# Altium PCB PCB1test.PcbDoc
Units mil, origin at the board's own origin, x right, y up, seen from the top; angles counter-clockwise.
Board outline 6000 x 4000 mil, 2 copper layers (Top Layer, Bottom Layer); 292 components, 184 nets, 916 pads, 0 vias.
Unrouted connection lines stored in the file: 615.
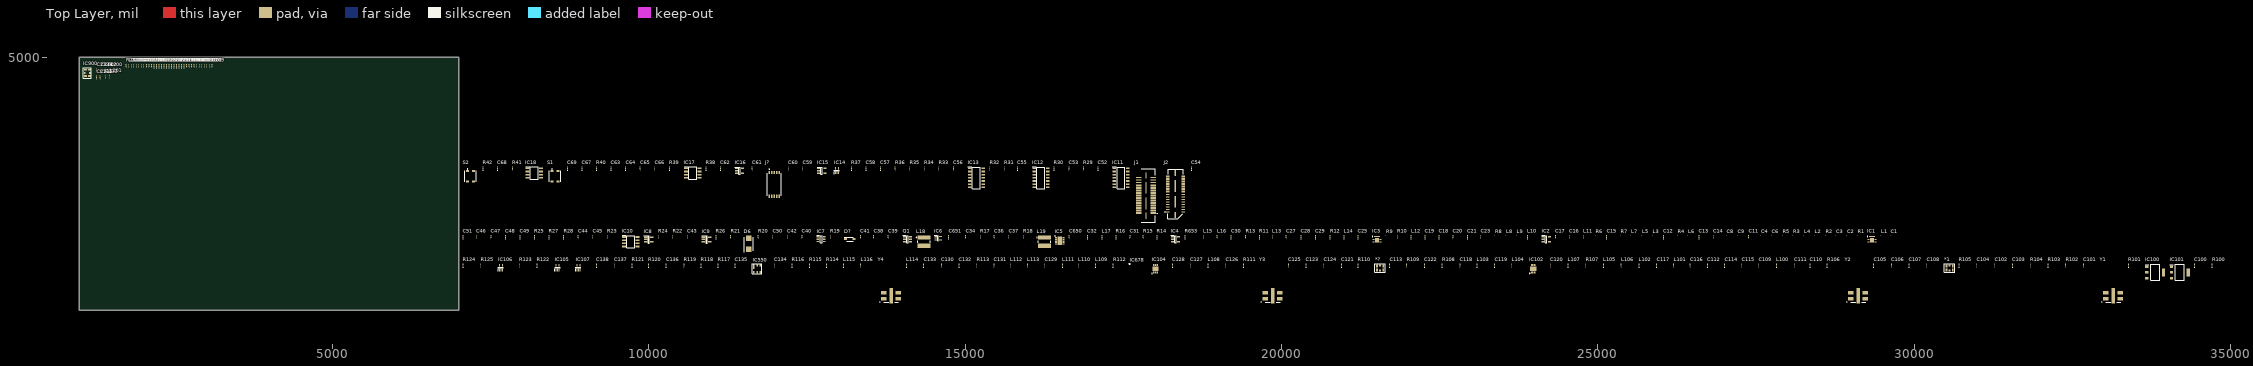
[diagram p0: Top Layer view]
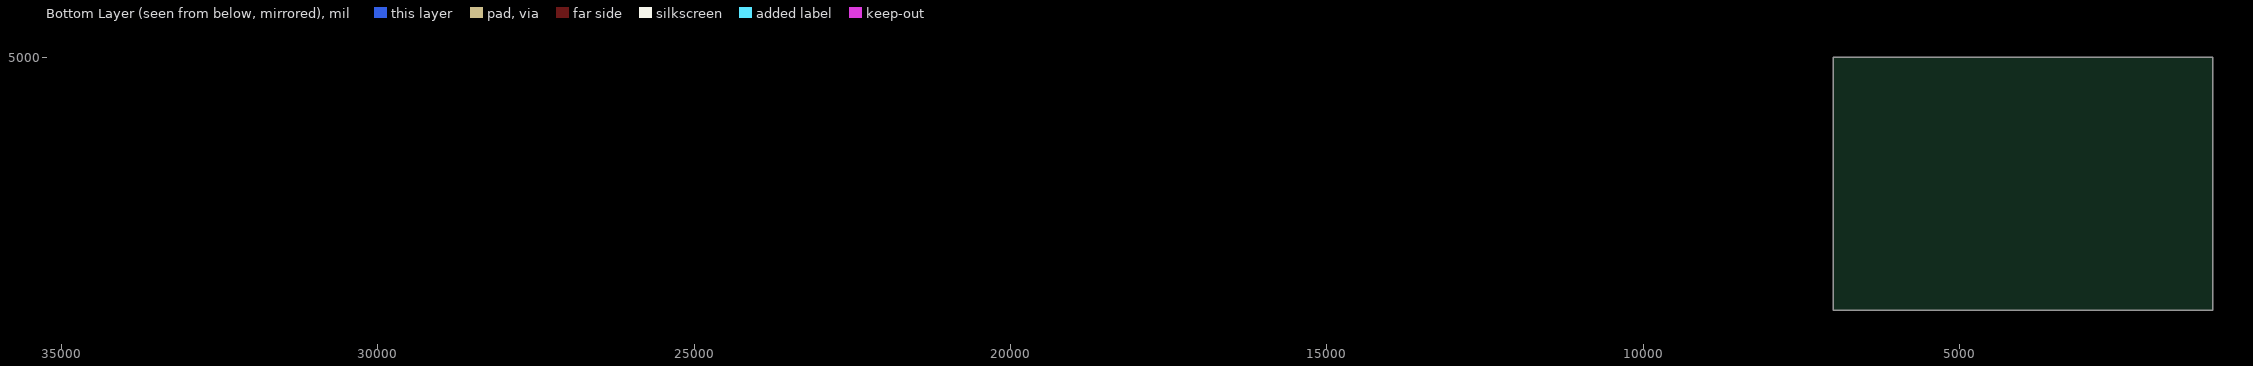
[diagram p1: Bottom Layer view, seen from below]

## Layer stack, top to bottom
Top Solder: solder mask 0.4, Solder Resist, Dk 3.5
Top Layer: signal copper 1.4
Dielectric 1: dielectric 12.6, FR-4, Dk 4.8
Bottom Layer: signal copper 1.4
Bottom Solder: solder mask 0.4, Solder Resist, Dk 3.5

## Board outline
1000,1000 7000,1000 7000,5000 1000,5000

## Design rules (kind name [scope] priority, off if disabled: settings)
Clearance [All] p1: gap=10 ignorepadtopadclearanceinfootprint=FALSE except(0: Arc-Hole Track-Hole SMDPad-Hole THPad-Hole Via-Hole Fill-Hole Poly-Hole Region-Hole Text-Hole)
PolygonConnect [All] p1: connectstyle=Relief reliefconductorwidth=10 reliefentries=4 polygonreliefangle="90 Angle" airgapwidth=10
RoomDefinition TELEMETRY [InComponentClass('TELEMETRY')] p1: confinementstyle=ConfineIn formatcopy=TRUE lockcomponents=FALSE outline 1020,3333.66 3740,3333.66 3740,4968.66 1020,4968.66
RoomDefinition Sheet1 [InComponentClass('Sheet1')] p2: confinementstyle=ConfineIn formatcopy=TRUE lockcomponents=FALSE outline 7045,2345 18755,2345 18755,3385 7045,3385
RoomDefinition PA [InComponentClass('PA')] p3: confinementstyle=ConfineIn formatcopy=TRUE lockcomponents=FALSE outline 7045,1900 29730,1900 29730,2300 7045,2300
RoomDefinition "Mixers and IF" [InComponentClass('Mixers and IF')] p4: confinementstyle=ConfineIn formatcopy=TRUE lockcomponents=FALSE outline 7045,1060 34935,1060 34935,1850 7045,1850
RoutingVias [All] p1: holewidth=28 width=50 viastyle="Through Hole" minholewidth=28 minwidth=50 maxholewidth=28 maxwidth=50
SolderMaskExpansion [All] p1: expansion=4 istentingtop=FALSE
Width [All] p1: maxlimit=10 minlimit=10 preferedwidth=10
30 further rules are at their usual default settings.

## Classes and differential pairs
component class TELEMETRY: C200 C201 C202 C203 C204 C205 C206 C207 C208 C209 C210 C211 C212 C213 C214 C215 IC200 IC201 IC202 IC203 IC900 L200 L201 L202 R200 R201 R202 R203 R204 R205 R206 R207 R208 R209 R210 R211 R212 R213 R214 R215 R216 R217 R218 R219 R220 R221 R222 R223
component class Sheet1: C52 C53 C54 C55 C56 C57 C58 C59 C60 C61 C62 C63 C64 C65 C66 C67 C68 C69 IC11 IC12 IC13 IC14 IC15 IC16 IC17 IC18 J1 J2 J? R29 R30 R31 R32 R33 R34 R35 R36 R37 R38 R39 R40 R41 R42 S1 S2
component class PA: C1 C2 C3 C4 C6 C8 C9 C11 C12 C13 C14 C15 C16 C17 C18 C19 C20 C21 C23 C25 C27 C28 C29 C30 C31 C32 C34 C36 C37 C38 C39 C40 C41 C42 C43 C44 C45 C46 C47 C48 C49 C50 C51 C650 C651 D6 D? IC1 IC2 IC3 IC4 IC5 IC6 IC7 IC8 IC9 IC10 L1 L2 L3 L4 L5 L6 L7 L8 L9 L10 L11 L12 L13 L14 L15 L16 L17 L18 L19 Q1 R1 R2 R3 R4 R5 R6 R7 R8 R9 R10 R11 R12 R13 R14 R15 R16 R17 R18 R19 R20 R21 R22 R23 R24 R25 R26 R27 R28 R653
component class "Mixers and IF": *1 *? C100 C101 C102 C103 C104 C105 C106 C107 C108 C109 C110 C111 C112 C113 C114 C115 C116 C117 C118 C119 C120 C121 C122 C123 C124 C125 C126 C127 C128 C129 C130 C131 C132 C133 C134 C135 C136 C137 C138 IC100 IC101 IC102 IC104 IC105 IC106 IC107 IC550 IC678 L100 L101 L102 L103 L104 L105 L106 L107 L108 L109 L110 L111 L112 L113 L114 L115 L116 R100 R101 R102 R103 R104 R105 R106 R107 R108 R109 R110 R111 R112 R113 R114 R115 R116 R117 R118 R119 R120 R121 R122 R123 R124 R125 Y1 Y2 Y3 Y4

## Components (designator, comment, footprint, x,y, rotation, side; value= is the part's Value field where it differs from the comment)
*1 "MQF326D REp" MQF326D 30510,1640 r0 top
*? "MQF326D REp" MQF326D 21510,1640 r0 top
C1 "Cap" 0603 29660,2180 r0 top value=33pF
C2 "Cap" 0603 28970,2180 r0 top value=1uF
C3 "Cap" 0603 28800,2180 r0 top value=470pF
C4 "Cap" 0603 27610,2180 r0 top value=12pF
C6 "Cap" 0603 27780,2180 r0 top value=5.1pF
C8 "Cap" 0603 27070,2180 r0 top value=10pF
C9 "Cap" 0603 27240,2180 r0 top value=5.1pF
C11 "Cap" 0603 27385,2165 r90 top value=470pF
C12 "Cap" 0603 26040,2165 r90 top value=470pF
C13 "Cap" 0603 26600,2165 r90 top value=470pF
C14 "Cap" 0603 26825,2165 r90 top value=10nF
C15 "Cap" 0603 25140,2165 r90 top value=33pF
C16 "Cap" 0603 24550,2165 r90 top value=6.8pF
C17 "Cap" 0603 24330,2165 r90 top value=470pF
C18 "Cap" 0603 22490,2165 r90 top value=470pF
C19 "Cap" 0603 22270,2165 r90 top value=470pF
C20 "Cap" 0603 22710,2165 r90 top value=5.1pF
C21 "Cap" 0603 22940,2165 r90 top value=16pF
C23 "Cap" 0603 23150,2165 r90 top value=5.1pF
C25 "Cap" 0603 21210,2165 r90 top value=470pF
C27 "Cap" 0603 20075,2165 r90 top value=12pF
C28 "Cap" 0603 20310,2165 r90 top value=470pF
C29 "Cap" 0603 20540,2165 r90 top value=1uF
C30 "Cap" 0603 19205,2165 r90 top value=470pF
C31 "Cap" 0603 17605,2165 r90 top value=470pF
C32 "Cap" 0603 16935,2165 r90 top value=470pF
C34 "Cap" 0603 15010,2165 r90 top value=1uF
C36 "Cap" 0603 15460,2165 r90 top value=4.7uF
C37 "Cap" 0603 15690,2165 r90 top value=4.7uF
C38 "Cap" 0603 13555,2165 r90 top value=22uF
C39 "Cap" 0603 13785,2165 r90 top value=22uF
C40 "Cap" 0603 12420,2165 r90 top value=47uF
C41 "Cap" 0603 13345,2165 r90 top value=.1uF
C42 "Cap" 0603 12190,2165 r90 top value=47uF
C43 "Cap" 0603 10610,2165 r90 top value=1uF
C44 "Cap" 0603 8885,2165 r90 top value=4.7uF
C45 "Cap" 0603 9115,2165 r90 top value=4.7uF
C46 "Cap" 0603 7275,2165 r90 top value=4.7uF
C47 "Cap" 0603 7505,2165 r90 top value=4.7uF
C48 "Cap" 0603 7735,2165 r90 top value=1uF
C49 "Cap" 0603 7965,2165 r90 top value=470pF
C50 "Cap" 0603 11960,2165 r90 top value=220pF
C51 "Cap" 0603 7065,2165 r90 top value=.1uF
C52 "Cap" 0603 17100,3250 r90 top value=470pF
C53 "Cap" 0603 16640,3250 r90 top value=470pF
C54 "Cap" 0603 18580,3250 r90 top value=470pF
C55 "Cap" 0603 15830,3250 r90 top value=470pF
C56 "Cap" 0603 14815,3250 r90 top value=470pF
C57 "Cap" 0603 13665,3250 r90 top value=470pF
C58 "Cap" 0603 13435,3250 r90 top value=470pF
C59 "Cap" 0603 12435,3250 r90 top value=.1uF
C60 "Cap" 0603 12205,3250 r90 top value=.1uF
C61 "Cap" 0603 11635,3250 r90 top value=.1uF
C62 "Cap" 0603 11135,3250 r90 top value=470pF
C63 "Cap" 0603 9405,3250 r90 top value=4.7uF
C64 "Cap" 0603 9635,3250 r90 top value=4.7uF
C65 "Cap" 0603 9865,3250 r90 top value=.1uF
C66 "Cap" 0603 10095,3250 r90 top value=.1uF
C67 "Cap" 0603 8945,3250 r90 top value=4.7uF
C68 "Cap" 0603 7610,3250 r90 top value=1uF
C69 "Cap" 0603 8715,3250 r90 top value=4.7uF
C100 "Cap" 0603 34430,1715 r90 top value=470pF
C101 "Cap" 0603 32675,1715 r90 top value=1nF
C102 "Cap" 0603 31275,1715 r90 top value=1nF
C103 "Cap" 0603 31555,1715 r90 top value=1nF
C104 "Cap" 0603 30990,1715 r90 top value=1nF
C105 "Cap" 0603 29360,1715 r90 top value=4.7uF
C106 "Cap" 0603 29640,1715 r90 top value=4.7uF
C107 "Cap" 0603 29920,1715 r90 top value=4.7uF
C108 "Cap" 0603 30200,1715 r90 top value=4.7uF
C109 "Cap" 0603 27545,1715 r90 top value=16pF
C110 "Cap" 0603 28355,1715 r90 top value=1.8pF
C111 "Cap" 0603 28105,1715 r90 top value=470pF
C112 "Cap" 0603 26735,1715 r90 top value=22pF
C113 "Cap" 0603 21710,1715 r90 top value=470pF
C114 "Cap" 0603 27005,1715 r90 top value=470pF
C115 "Cap" 0603 27275,1715 r90 top value=470pF
C116 "Cap" 0603 26460,1715 r90 top value=.5pF
C117 "Cap" 0603 25930,1715 r90 top value=1.8pF
C118 "Cap" 0603 22820,1715 r90 top value=82pF
C119 "Cap" 0603 23370,1715 r90 top value=82pF
C120 "Cap" 0603 24250,1715 r90 top value=1nF
C121 "Cap" 0603 20950,1715 r90 top value=1nF
C122 "Cap" 0603 22260,1715 r90 top value=1.8pF
C123 "Cap" 0603 20390,1715 r90 top value=1.8pF
C124 "Cap" 0603 20670,1715 r90 top value=1.8pF
C125 "Cap" 0603 20110,1715 r90 top value=1nF
C126 "Cap" 0603 19120,1715 r90 top value=1.8pF
C127 "Cap" 0603 18560,1715 r90 top value=3.9pF
C128 "Cap" 0603 18280,1715 r90 top value=1.8pF
C129 "Cap" 0603 16260,1715 r90 top value=470pF
C130 "Cap" 0603 14625,1715 r90 top value=1.2pF
C131 "Cap" 0603 15455,1715 r90 top value=470pF
C132 "Cap" 0603 14905,1715 r90 top value=1.8pF
C133 "Cap" 0603 14345,1715 r90 top value=470pF
C134 "Cap" 0603 11985,1715 r90 top value=1nF
C135 "Cap" 0603 11365,1715 r90 top value=1nF
C136 "Cap" 0603 10275,1715 r90 top value=1.8pF
C137 "Cap" 0603 9455,1715 r90 top value=1nF
C138 "Cap" 0603 9175,1715 r90 top value=1nF
C200 "Cap" 0603 1940.48,4871.22 r90 top value=10nF
C201 "Cap" 0603 1980.29,4871.22 r90 top value=180pF
C202 "Cap" 0603 1900.67,4871.22 r90 top value=560pF
C203 "Cap" 0603 1821.05,4871.22 r90 top value=270pF
C204 "Cap" 0603 1860.86,4871.22 r90 top value=270pF
C205 "Cap" 0603 2020.1,4871.22 r90 top value=1nF
C206 "Cap" 0603 2179.35,4871.22 r90 top value=4.7uF
C207 "Cap" 0603 2219.16,4871.22 r90 top value=2.2pF
C208 "Cap" 0603 2139.54,4871.22 r90 top value=2.2pF
C209 "Cap" 0603 2059.91,4871.22 r90 top value=2.2pF
C210 "Cap" 0603 2099.73,4871.22 r90 top value=2.2pF
C211 "Cap" 0603 1340,4802.44 r90 top value=1nF
C212 "Cap" 0603 1410,4692.44 r90 top value=10nF
C213 "Cap" 0603 1275,4801.22 r90 top value=1nF
C214 "Cap" 0603 1275,4691.22 r90 top value=4.7uF
C215 "Cap" 0603 1330,4691.22 r90 top value=4.7uF
C650 "Cap" 0603 16645,2165 r90 top value=39pF
C651 "Cap" 0603 14740,2165 r90 top value=39pF
D6 "MBRS120T3G" DIOM5436X247N 11580,2050 r90 top
D? "BAT46W-7-F" SOD3716X145N 13180,2125 r0 top
IC1 "RFPA0133TR7" QFN50P300X300X86-17N-D 29335,2110 r0 top
IC2 "RF2878SR" SOT95P280X159-5N 24185,2125 r0 top
IC3 "RFPA0133TR7" QFN50P300X300X86-17N-D 21510,2110 r0 top
IC4 "RF2878SR" SOT95P280X159-5N 18325,2125 r0 top
IC5 "LTC5533EDE#PBF" SON50P300X400X85-13N-D 16495,2100 r0 top
IC6 "FPF2000" SOT65P210X110-5N 14575,2140 r0 top
IC7 "LTC1772CS6#TRMPBF" SOT95P280X100-6N 12725,2125 r0 top
IC8 "MCP6231UT-E_OT" SOT95P270X145-5N 10000,2120 r0 top
IC9 "MCP6231UT-E_OT" SOT95P270X145-5N 10915,2120 r0 top
IC10 "LT1963AES8-3.3#PBF" SOIC127P599X175-8N 9715,2085 r0 top
IC11 "SN74HC00D" SOIC127P600X175-14N 17465,3095 r0 top
IC12 "MM74HC02M" SOIC127P600X175-14N 16200,3095 r0 top
IC13 "SN74HC00D" SOIC127P600X175-14N 15180,3095 r0 top
IC14 "FPF2000" SOT65P210X110-5N 12975,3210 r90 top
IC15 "TMP36GRTZ-REEL7" SOT95P280X145-5N 12735,3205 r0 top
IC16 "INA194AIDBVT" SOT95P280X145-5N 11435,3205 r0 top
IC17 "FPF2700MX" SOIC127P600X175-8N 10695,3170 r0 top
IC18 "LT1963AES8-3.3#PBF" SOIC127P599X175-8N 8190,3170 r0 top
IC100 "LT1963EST-2.5" SOT230P700X180-4N 33810,1600 r0 top
IC101 "LT1963EST-2.5" SOT230P700X180-4N 34200,1600 r0 top
IC102 "LT5560EDD#PBF" SON50P300X300X80-9N-D 23980,1660 r90 top
IC104 "LT5560EDD#PBF" SON50P300X300X80-9N-D 18010,1660 r90 top
IC105 "MCP6231UT-E_LT" SOT65P210X110-5N 8560,1675 r90 top
IC106 "FPF2004" SOT65P210X110-5N 7665,1675 r90 top
IC107 "FPF2000" SOT65P210X110-5N 8890,1675 r90 top
IC550 "AFS434S3-T" AFS434S3 11790,1580 r90 top
IC678 "rf2637" RF2637 17600,1730 r90 top
IC900 "MQF326D REp" MQF326D 1158.44,4702.61 r90 top
J1 "QSH-030-01-L-D-A-K" QSH03001LDAK 17860,2815 r90 top
J2 "QTH-030-02-L-D-A" QTH03002LDA 18325,2840 r90 top
J? "FSI-105-06-L-D-AD-TR" FSI10506LDADTR 11985,2990 r0 top
L1 "Inductor" 0603 29510,2180 r0 top value=8.7nH
L2 "Inductor" 0603 28460,2180 r0 top value=18nH
L3 "Inductor" 0603 25900,2180 r0 top value=10.4nH
L4 "Inductor" 0603 28290,2180 r0 top value=18nH
L5 "Inductor" 0603 25730,2180 r0 top value=25nH
L6 "Inductor" 0603 26460,2180 r0 top value=25nH
L7 "Inductor" 0603 25560,2180 r0 top value=18nH
L8 "Inductor" 0603 23580,2180 r0 top value=8.7nH
L9 "Inductor" 0603 23750,2180 r0 top value=25nH
L10 "Inductor" 0603 23890,2165 r90 top value=18nH
L11 "Inductor" 0603 24770,2165 r90 top value=25nH
L12 "Inductor" 0603 22050,2165 r90 top value=18nH
L13 "Inductor" 0603 19855,2165 r90 top value=18nH
L14 "Inductor" 0603 20990,2165 r90 top value=10.4nH
L15 "Inductor" 0603 18765,2165 r90 top value=39nH
L16 "Inductor" 0603 18985,2165 r90 top value=18nH
L17 "Inductor" 0603 17165,2165 r90 top value=39nH
L18 "MSS5131-472MLB" MSS5131 14350,2085 r0 top
L19 "MSS5131-103MLB" MSS5131 16255,2085 r0 top
L100 "Inductor" 0603 27825,1715 r90 top value=18nH
L101 "Inductor" 0603 26200,1715 r90 top value=10mH
L102 "Inductor" 0603 25650,1715 r90 top value=18nH
L103 "Inductor" 0603 23090,1715 r90 top value=?????
L104 "Inductor" 0603 23640,1715 r90 top value=?????
L105 "Inductor" 0603 25090,1715 r90 top value=2.7uH
L106 "Inductor" 0603 25370,1715 r90 top value=8.2uH
L107 "Inductor" 0603 24530,1715 r90 top value=2.7uH
L108 "Inductor" 0603 18840,1715 r90 top value=8.2uH
L109 "Inductor" 0603 17060,1715 r90 top value=18nH
L110 "Inductor" 0603 16790,1715 r90 top value=68nH
L111 "Inductor" 0603 16540,1715 r90 top value=8.2nH
L112 "Inductor" 0603 15715,1715 r90 top value=2.2uH
L113 "Inductor" 0603 15985,1715 r90 top value=68nH
L114 "Inductor" 0603 14075,1715 r90 top value=2.2uH
L115 "Inductor" 0603 13080,1715 r90 top value=8.2uH
L116 "Inductor" 0603 13350,1715 r90 top value=1.5uH
L200 "Inductor" 0603 1781.24,4871.22 r90 top value=120nH
L201 "Inductor" 0603 1481.62,4703.78 r90 top value=47nH
L202 "Inductor" 0603 1405,4802.44 r90 top value=330nH
Q1 "FDC638P" SOT95P280X110-6N 14090,2125 r0 top
R1 "Res1" 0603 29140,2180 r0 top value=10
R2 "Res1" 0603 28630,2180 r0 top value=560
R3 "Res1" 0603 28120,2180 r0 top value=510
R4 "Res1" 0603 26290,2180 r0 top value=200
R5 "Res1" 0603 27950,2180 r0 top value=1.8k
R6 "Res1" 0603 25000,2180 r0 top value=100
R7 "Res1" 0603 25390,2180 r0 top value=100
R8 "Res1" 0603 23410,2180 r0 top value=10
R9 "Res1" 0603 21685,2180 r0 top value=200
R10 "Res1" 0603 21830,2165 r90 top value=1.5k
R11 "Res1" 0603 19655,2165 r90 top value=15
R12 "Res1" 0603 20770,2165 r90 top value=49.9
R13 "Res1" 0603 19435,2165 r90 top value=1.2k
R14 "Res1" 0603 18035,2165 r90 top value=510
R15 "Res1" 0603 17815,2165 r90 top value=2k
R16 "Res1" 0603 17385,2165 r90 top value=15
R17 "Res1" 0603 15240,2165 r90 top value=68k
R18 "Res1" 0603 15920,2165 r90 top value=.03
R19 "Res1" 0603 12870,2165 r90 top value=12k
R20 "Res1" 0603 11730,2165 r90 top value=100k
R21 "Res1" 0603 11295,2165 r90 top value=4.7k
R22 "Res1" 0603 10380,2165 r90 top value=1.8k
R23 "Res1" 0603 9345,2165 r90 top value=470k
R24 "Res1" 0603 10150,2165 r90 top value=200k
R25 "Res1" 0603 8195,2165 r90 top value=5.11k
R26 "Res1" 0603 11065,2165 r90 top value=10k
R27 "Res1" 0603 8425,2165 r90 top value=300k
R28 "Res1" 0603 8655,2165 r90 top value=3.83k
R29 "Res1" 0603 16870,3250 r90 top value=1M
R30 "Res1" 0603 16405,3250 r90 top value=100
R31 "Res1" 0603 15620,3250 r90 top value=100
R32 "Res1" 0603 15390,3250 r90 top value=1M
R33 "Res1" 0603 14585,3250 r90 top value=1M
R34 "Res1" 0603 14355,3250 r90 top value=100
R35 "Res1" 0603 14125,3250 r90 top value=100
R36 "Res1" 0603 13895,3250 r90 top value=1M
R37 "Res1" 0603 13205,3250 r90 top value=100
R38 "Res1" 0603 10905,3250 r90 top value=100
R39 "Res1" 0603 10330,3250 r90 top value=.1
R40 "Res1" 0603 9175,3250 r90 top value=430k
R41 "Res1" 0603 7845,3250 r90 top value=5.76k
R42 "Res1" 0603 7380,3250 r90 top value=3.83k
R100 "Res1" 0603 34710,1715 r90 top value=TBD
R101 "Res1" 0603 33390,1715 r90 top value=470
R102 "Res1" 0603 32395,1715 r90 top value=10k
R103 "Res1" 0603 32115,1715 r90 top value=470
R104 "Res1" 0603 31835,1715 r90 top value=15k
R105 "Res1" 0603 30710,1715 r90 top value=2.2k
R106 "Res1" 0603 28625,1715 r90 top value=470
R107 "Res1" 0603 24810,1715 r90 top value=1K
R108 "Res1" 0603 22540,1715 r90 top value=TBD
R109 "Res1" 0603 21980,1715 r90 top value=15k
R110 "Res1" 0603 21210,1715 r90 top value=10k
R111 "Res1" 0603 19400,1715 r90 top value=470
R112 "Res1" 0603 17340,1715 r90 top value=560
R113 "Res1" 0603 15185,1715 r90 top value=510
R114 "Res1" 0603 12810,1715 r90 top value=470
R115 "Res1" 0603 12540,1715 r90 top value=560
R116 "Res1" 0603 12265,1715 r90 top value=62
R117 "Res1" 0603 11095,1715 r90 top value=2.7k
R118 "Res1" 0603 10825,1715 r90 top value=470
R119 "Res1" 0603 10555,1715 r90 top value=5.1
R120 "Res1" 0603 9995,1715 r90 top value=2.2k
R121 "Res1" 0603 9735,1715 r90 top value=1k
R122 "Res1" 0603 8235,1715 r90 top value=1k
R123 "Res1" 0603 7955,1715 r90 top value=10k
R124 "Res1" 0603 7065,1715 r90 top value=10k
R125 "Res1" 0603 7345,1715 r90 top value=4.7k
R200 "Res1" 0603 1480,4802.44 r90 top value=68
R201 "Res1" 0603 1741.43,4871.22 r90 top value=100
R202 "Res1" 0603 2816.32,4871.22 r90 top value=100
R203 "Res1" 0603 2856.13,4871.22 r90 top value=TBD
R204 "Res1" 0603 2776.51,4871.22 r90 top value=10K
R205 "Res1" 0603 2696.89,4871.22 r90 top value=15K
R206 "Res1" 0603 2736.7,4871.22 r90 top value=10k
R207 "Res1" 0603 2895.95,4871.22 r90 top value=1k
R208 "Res1" 0603 3055.19,4871.22 r90 top value=10k
R209 "Res1" 0603 3095,4871.22 r90 top value=20k
R210 "Res1" 0603 3015.38,4871.22 r90 top value=200
R211 "Res1" 0603 2935.76,4871.22 r90 top value=10k
R212 "Res1" 0603 2975.57,4871.22 r90 top value=1K
R213 "Res1" 0603 2378.4,4871.22 r90 top value=1K
R214 "Res1" 0603 2418.21,4871.22 r90 top value=200
R215 "Res1" 0603 2338.59,4871.22 r90 top value=1K
R216 "Res1" 0603 2258.97,4871.22 r90 top value=1K
R217 "Res1" 0603 2298.78,4871.22 r90 top value=1K
R218 "Res1" 0603 2458.02,4871.22 r90 top value=1k
R219 "Res1" 0603 2617.27,4871.22 r90 top value=10k
R220 "Res1" 0603 2657.08,4871.22 r90 top value=20k
R221 "Res1" 0603 2577.46,4871.22 r90 top value=1.5k
R222 "Res1" 0603 2497.84,4871.22 r90 top value=56k
R223 "Res1" 0603 2537.65,4871.22 r90 top value=48.7k
R653 "Res1" 0603 18475,2165 r90 top value=1.5k
S1 "HDT0004" HDT0004 8520,3120 r0 top
S2 "HDT0004" HDT0004 7185,3120 r0 top
Y1 "ECS-75SMF45A30B" ECS75SMF45A30B 33145,1230 r0 top
Y2 "ECS-75SMF45A30B" ECS75SMF45A30B 29115,1230 r0 top
Y3 "ECS-75SMF45A30B" ECS75SMF45A30B 19860,1230 r0 top
Y4 "ECS-75SMF45A30B" ECS75SMF45A30B 13830,1230 r0 top

## Footprints (in the part's own frame and the unit in brackets; to place one, negate y for a bottom-side part, rotate by r counter-clockwise, add the part's x,y. Pads: shape width x height; smd on the part's side, far side on the other; paste and mask are expansions set on the pad)
0603 [mm] "Chip Inductor, Body 0.6x0.3mm, IPC High Density"
  rect 0.5x0.3 smd: 1(-0.35,0) 2(0.35,0)
  silkscreen extent -0.9,-0.05 -0.9,0.05, body extent -0.33,-0.18 0.33,0.18, height 0.55
AFS434S3 [mm]
  rect 2x0.6 smd: 1(2.784,3.233)
  rect 1x0.6 smd: 2(3.284,1.973) 3(3.284,0.694) 4(0.634,0.694) 5(0.634,1.966) 6(0.634,3.234)
  silkscreen extent 0.04,0.03 4.05,3.89
DIOM5436X247N [mm]
  rect 2.25x2.15 smd: 1(-2.2,0) 2(2.2,0)
  silkscreen extent -3.27,-1.81 2.7,1.81, body extent -2.7,-1.81 2.7,1.81, height 2.47
ECS75SMF45A30B [mm]
  rect 2.2x1.4 smd: 1(-2.9,-1.27) 3(2.9,-1.27) 4(2.9,1.27) 6(-2.9,1.27)
  rect 1.4x3.05 smd: 2(0,-1.525) 5(0,1.525)
  silkscreen extent -4.6,-2.55 3,-2.45, body extent -3.86,-2.91 3.86,13.05, height 10
FSI10506LDADTR [mm]
  rect 0.61x1.26 smd: 1(-2,4.73) 2(-2,-4.73) 3(-1,4.73) 4(-1,-4.73) 5(0,4.73) 6(0,-4.73) 7(1,4.73) 8(1,-4.73) 9(2,4.73) 10(2,-4.73)
  round 0.595 hole 1.19 unplated: MH1(-2,0) MH2(2,0)
  silkscreen extent -2.88,-4.51 2.88,6.2, body extent -2.88,-5.3 2.88,5.3, height 7.5
HDT0004 [mm]
  rect 1.2x0.8 smd: 1(-1.2,2.15) 2(1.2,2.15) 3(-1.2,-2.15) 4(1.2,-2.15)
  silkscreen extent -2.35,-2.25 2.35,3, body extent -2.35,-2.47 2.35,2.47, height 3.1
MQF326D [mm]
  rect 0.75x1.2 smd: 1(2.557,0.011) 3(-0.004,0.011) 4(2.557,1.611) 6(-0.004,1.611)
  rect 0.75x0.78 smd: 2(1.277,-0.199) 5(1.277,1.821)
  silkscreen extent -0.89,-0.88 3.4,2.5
MSS5131 [mm]
  rect 5.08x1.74 smd: 1(0,1.67) 2(0,-1.67)
  silkscreen extent -3.14,-0.4 2.55,1.78
QFN50P300X300X86-17N-D [mm]
  rect 0.8x0.25 smd: 1(-1.45,0.75) 2(-1.45,0.25) 3(-1.45,-0.25) 4(-1.45,-0.75) 5(-0.75,-1.45) 6(-0.25,-1.45) 7(0.25,-1.45) 8(0.75,-1.45) 9(1.45,-0.75) 10(1.45,-0.25) 11(1.45,0.25) 12(1.45,0.75) 13(0.75,1.45) 14(0.25,1.45) 15(-0.25,1.45) 16(-0.75,1.45)
  rect 1.75x1.75 smd: 17(0,0)
  silkscreen extent -1.97,1.38 -1.72,1.62, body extent -1.55,-1.55 1.55,1.55, height 0.85
QSH03001LDAK [mm]
  rect 0.279x2.27 smd: 1(-7.25,-2.865) 2(-7.25,2.865) 3(-6.75,-2.865) 4(-6.75,2.865) 5(-6.25,-2.865) 6(-6.25,2.865) 7(-5.75,-2.865) 8(-5.75,2.865) 9(-5.25,-2.865) 10(-5.25,2.865) 11(-4.75,-2.865) 12(-4.75,2.865) 13(-4.25,-2.865) 14(-4.25,2.865) 15(-3.75,-2.865) 16(-3.75,2.865) 17(-3.25,-2.865) 18(-3.25,2.865) 19(-2.75,-2.865) 20(-2.75,2.865) 21(-2.25,-2.865) 22(-2.25,2.865) 23(-1.75,-2.865) 24(-1.75,2.865) 25(-1.25,-2.865) 26(-1.25,2.865) 27(-0.75,-2.865) 28(-0.75,2.865) 29(-0.25,-2.865) 30(-0.25,2.865) 31(0.25,-2.865) 32(0.25,2.865) 33(0.75,-2.865) 34(0.75,2.865) 35(1.25,-2.865) 36(1.25,2.865) 37(1.75,-2.865) 38(1.75,2.865) 39(2.25,-2.865) 40(2.25,2.865) 41(2.75,-2.865) 42(2.75,2.865) 43(3.25,-2.865) 44(3.25,2.865) 45(3.75,-2.865) 46(3.75,2.865) 47(4.25,-2.865) 48(4.25,2.865) 49(4.75,-2.865) 50(4.75,2.865) 51(5.25,-2.865) 52(5.25,2.865) 53(5.75,-2.865) 54(5.75,2.865) 55(6.25,-2.865) 56(6.25,2.865) 57(6.75,-2.865) 58(6.75,2.865) 59(7.25,-2.865) 60(7.25,2.865)
  round 0.51 hole 1.02 unplated: MH1(-10.065,2.67) MH2(10.065,2.67)
  rect 2.54x0.43 smd: MP1(-8.065,0) MP2(8.065,0)
  rect 4.7x0.43 smd: MP3(-3.175,0) MP4(3.175,0)
  silkscreen extent -10.66,-4.6 10.66,2, body extent -10.66,-3.97 10.66,3.97, height 3.45
QTH03002LDA [mm]
  rect 0.305x1.45 smd: 1(-7.25,3.086) 2(-7.25,-3.086) 3(-6.75,3.086) 4(-6.75,-3.086) 5(-6.25,3.086) 6(-6.25,-3.086) 7(-5.75,3.086) 8(-5.75,-3.086) 9(-5.25,3.086) 10(-5.25,-3.086) 11(-4.75,3.086) 12(-4.75,-3.086) 13(-4.25,3.086) 14(-4.25,-3.086) 15(-3.75,3.086) 16(-3.75,-3.086) 17(-3.25,3.086) 18(-3.25,-3.086) 19(-2.75,3.086) 20(-2.75,-3.086) 21(-2.25,3.086) 22(-2.25,-3.086) 23(-1.75,3.086) 24(-1.75,-3.086) 25(-1.25,3.086) 26(-1.25,-3.086) 27(-0.75,3.086) 28(-0.75,-3.086) 29(-0.25,3.086) 30(-0.25,-3.086) 31(0.25,3.086) 32(0.25,-3.086) 33(0.75,3.086) 34(0.75,-3.086) 35(1.25,3.086) 36(1.25,-3.086) 37(1.75,3.086) 38(1.75,-3.086) 39(2.25,3.086) 40(2.25,-3.086) 41(2.75,3.086) 42(2.75,-3.086) 43(3.25,3.086) 44(3.25,-3.086) 45(3.75,3.086) 46(3.75,-3.086) 47(4.25,3.086) 48(4.25,-3.086) 49(4.75,3.086) 50(4.75,-3.086) 51(5.25,3.086) 52(5.25,-3.086) 53(5.75,3.086) 54(5.75,-3.086) 55(6.25,3.086) 56(6.25,-3.086) 57(6.75,3.086) 58(6.75,-3.086) 59(7.25,3.086) 60(7.25,-3.086)
  rect 4.7x0.64 smd: 61(-3.175,0) 62(3.175,0)
  rect 2.54x0.64 smd: 63(8.445,0) 64(-8.445,0)
  silkscreen extent -10,-3 10,4.25, body extent -10,-3.78 10,3.78, height 7.16
RF2637 [mm]
  rect 0.025x0.012 smd: 1(0,0) 2(0,-0.026) 3(0,-0.051) 4(0,-0.077) 5(0.171,-0.077) 6(0.171,-0.051) 7(0.171,-0.026) 8(0.171,0)
  silkscreen extent -0.12,-0.19 0.29,0.11
SOD3716X145N [mm]
  rect 1.2x0.75 smd: 1(-1.7,0) 2(1.7,0)
  silkscreen extent -2.3,-0.77 1.35,0.77, body extent -1.85,-0.77 1.85,0.77, height 1.45
SOIC127P599X175-8N [mm]
  rect 1.526x0.65 smd: 1(-2.712,1.905) 2(-2.712,0.635) 3(-2.712,-0.635) 4(-2.712,-1.905) 5(2.712,-1.905) 6(2.712,-0.635) 7(2.712,0.635) 8(2.712,1.905)
  silkscreen extent -3.47,-2.45 1.6,2.58, body extent -3,-2.45 3,2.45, height 1.75
SOIC127P600X175-8N [mm]
  rect 1.525x0.65 smd: 1(-2.712,1.905) 2(-2.712,0.635) 3(-2.712,-0.635) 4(-2.712,-1.905) 5(2.712,-1.905) 6(2.712,-0.635) 7(2.712,0.635) 8(2.712,1.905)
  silkscreen extent -3.47,-2.45 1.6,2.58, body extent -3,-2.45 3,2.45, height 1.75
SOIC127P600X175-14N [mm]
  rect 1.525x0.65 smd: 1(-2.712,3.81) 2(-2.712,2.54) 3(-2.712,1.27) 4(-2.712,0) 5(-2.712,-1.27) 6(-2.712,-2.54) 7(-2.712,-3.81) 8(2.712,-3.81) 9(2.712,-2.54) 10(2.712,-1.27) 11(2.712,0) 12(2.712,1.27) 13(2.712,2.54) 14(2.712,3.81)
  silkscreen extent -3.47,-4.33 1.6,4.48, body extent -3,-4.33 3,4.33, height 1.75
SON50P300X300X80-9N-D [mm]
  rect 0.8x0.3 smd: 1(-1.5,0.75) 2(-1.5,0.25) 3(-1.5,-0.25) 4(-1.5,-0.75) 5(1.5,-0.75) 6(1.5,-0.25) 7(1.5,0.25) 8(1.5,0.75)
  rect 1.75x2.48 smd: 9(0,0)
  silkscreen extent -2.02,1.27 -1.78,1.52, body extent -1.55,-1.5 1.55,1.5, height 0.8
SON50P300X400X85-13N-D [mm]
  rect 0.8x0.3 smd: 1(-1.5,1.25) 2(-1.5,0.75) 3(-1.5,0.25) 4(-1.5,-0.25) 5(-1.5,-0.75) 6(-1.5,-1.25) 7(1.5,-1.25) 8(1.5,-0.75) 9(1.5,-0.25) 10(1.5,0.25) 11(1.5,0.75) 12(1.5,1.25)
  rect 1.8x3.4 smd: 13(0,0)
  silkscreen extent -2.02,1.78 -1.77,2.02, body extent -1.55,-2 1.55,2, height 0.85
SOT65P210X110-5N [mm]
  rect 1.05x0.4 smd: 1(-0.95,0.65) 2(-0.95,0) 3(-0.95,-0.65) 4(0.95,-0.65) 5(0.95,0.65)
  silkscreen extent -1.48,-1 0.08,1.1, body extent -1.05,-1 1.05,1, height 1.1
SOT95P270X145-5N [mm]
  rect 1.4x0.6 smd: 1(-1.25,0.95) 2(-1.25,0) 3(-1.25,-0.95) 4(1.25,-0.95) 5(1.25,0.95)
  silkscreen extent -1.95,-1.45 0.2,1.5, body extent -1.35,-1.45 1.35,1.45, height 1.45
SOT95P280X100-6N [mm]
  rect 1.05x0.55 smd: 1(-1.3,0.95) 2(-1.3,0) 3(-1.3,-0.95) 4(1.3,-0.95) 5(1.3,0) 6(1.3,0.95)
  silkscreen extent -1.83,-1.45 0.43,1.58, body extent -1.4,-1.45 1.4,1.45, height 1
SOT95P280X110-6N [mm]
  rect 1.2x0.6 smd: 1(-1.25,0.95) 2(-1.25,0) 3(-1.25,-0.95) 4(1.25,-0.95) 5(1.25,0) 6(1.25,0.95)
  silkscreen extent -1.85,-1.45 0.3,1.6, body extent -1.4,-1.45 1.4,1.45, height 1.1
SOT95P280X145-5N [mm]
  rect 1.2x0.6 smd: 1(-1.25,0.95) 2(-1.25,0) 3(-1.25,-0.95) 4(1.25,-0.95) 5(1.25,0.95)
  silkscreen extent -1.85,-1.45 0.3,1.5, body extent -1.4,-1.45 1.4,1.45, height 1.45
SOT95P280X159-5N [mm]
  rect 1.2x0.6 smd: 1(-1.25,0.95) 2(-1.25,0) 3(-1.25,-0.95) 4(1.25,-0.95) 5(1.25,0.95)
  silkscreen extent -1.85,-1.45 0.3,1.5, body extent -1.4,-1.45 1.4,1.45, height 1.59
SOT230P700X180-4N [mm]
  rect 1.35x0.95 smd: 1(-3.35,2.3) 2(-3.35,0) 3(-3.35,-2.3)
  rect 1.35x3.25 smd: 4(3.35,0)
  silkscreen extent -4.03,-3.25 1.75,3.25, body extent -3.5,-3.25 3.5,3.25, height 1.8

## Part data
*1 *? IC550 IC678 IC900: library part Component_1
C1 C2 C3 C4 C6 C8 C9 C11 C12 C13 C14 C15 C16 C17 C18 C19 C20 C21 C23 C25 C27 C28 C29 C30 C31 C32 C34 C36 C37 C38 C39 C40 C41 C42 C43 C44 C45 C46 C47 C48 C49 C50 C51 C52 C53 C54 C55 C56 C57 C58 C59 C60 C61 C62 C63 C64 C65 C66 C67 C68 C69 C100 C101 C102 C103 C104 C105 C106 C107 C108 C109 C110 C111 C112 C113 C114 C115 C116 C117 C118 C119 C120 C121 C122 C123 C124 C125 C126 C127 C128 C129 C130 C131 C132 C133 C134 C135 C136 C137 C138 C200 C201 C202 C203 C204 C205 C206 C207 C208 C209 C210 C211 C212 C213 C214 C215 C650 C651: "Capacitor", LatestRevisionDate=17-Jul-2002, LatestRevisionNote="Re-released for DXP Platform.", PackageDescription="Radial Cap, Thru-Hole; 2 Leads; 0.3 in Pin Spacing", PackageReference=RAD-0.3, Published=8-Jun-2000, Publisher="Altium Limited"
D6: "Diode", Manufacturer_Name="ON Semiconductor", Mouser Part Number=863-MBRS120T3G, RS Part Number=5452068P, Allied Price/Stock=http://www.alliedelec.com/on-semiconductor-mbrs120t3g/70339713/, Allied_Number=70339713, Datasheet Link=http://www.onsemi.com/pub/Collateral/MBRS120T3-D.PDF, Height=2.47mm, Manufacturer_Part_Number=MBRS120T3G, Mouser Price/Stock=https://www.mouser.com/Search/Refine.aspx?Keyword=863-MBRS120T3G, RS Price/Stock=http://uk.rs-online.com/web/p/products/5452068P
D?: "Diode", Manufacturer_Name="Diodes Inc.", Mouser Part Number=621-BAT46W-7-F, RS Part Number=7513373P, Allied Price/Stock=https://www.alliedelec.com/diodes-inc-bat46w-7-f/71028110/, Allied_Number=71028110, Datasheet Link=https://componentsearchengine.com/Datasheets/2/BAT46W-7-F.pdf, Height=1.45mm, Manufacturer_Part_Number=BAT46W-7-F, Mouser Price/Stock=https://www.mouser.com/Search/Refine.aspx?Keyword=621-BAT46W-7-F, RS Price/Stock=http://uk.rs-online.com/web/p/products/7513373P
IC1 IC3: "Integrated Circuit", Manufacturer_Name=Qorvo, Mouser Part Number=772-RFPA0133, Datasheet Link=http://www.qorvo.com/products/d/da000936, Height=0.855mm, Manufacturer_Part_Number=RFPA0133TR7, Mouser Price/Stock=https://www.mouser.com/Search/Refine.aspx?Keyword=772-RFPA0133
IC2 IC4: "Integrated Circuit", Manufacturer_Name=RFMD, Datasheet Link=https://datasheet.octopart.com/RF2878SR-RFMD-datasheet-17020116.pdf, Height=1.59mm, Manufacturer_Part_Number=RF2878SR
IC5: "Integrated Circuit", Manufacturer_Name="Linear Technology", Datasheet Link=https://componentsearchengine.com/Datasheets/2/LTC5533EDE#PBF.pdf, Height=0.85mm, Manufacturer_Part_Number=LTC5533EDE#PBF
IC6 IC14 IC107: "Integrated Circuit", Manufacturer_Name="ON Semiconductor", Mouser Part Number=512-FPF2000, RS Part Number=6709942P, Datasheet Link=https://www.onsemi.com/pub/Collateral/FPF2001-D.pdf, Height=1.1mm, Manufacturer_Part_Number=FPF2000, Mouser Price/Stock=https://www.mouser.com/Search/Refine.aspx?Keyword=512-FPF2000, RS Price/Stock=http://uk.rs-online.com/web/p/products/6709942P
IC7: "Integrated Circuit", Manufacturer_Name="Linear Technology", Mouser Part Number=584-LTC1772CS6TRMPBF, RS Part Number=0411891, Datasheet Link=http://docs-emea.rs-online.com/webdocs/0ab8/0900766b80ab84d2.pdf, Height=1mm, Manufacturer_Part_Number=LTC1772CS6#TRMPBF, Mouser Price/Stock=https://www.mouser.com/Search/Refine.aspx?Keyword=584-LTC1772CS6TRMPBF, RS Price/Stock=http://uk.rs-online.com/web/p/products/0411891
IC8 IC9: "Integrated Circuit", Manufacturer_Name=Microchip, Manufacturer_Part_Number=MCP6231UT-E/OT, Mouser Part Number=579-MCP6231UT-E/OT, RS Part Number=6674468, Allied Price/Stock=http://www.alliedelec.com/microchip-technology-inc-mcp6231ut-e-ot/70414221/, Allied_Number=70414221, Datasheet Link=http://ww1.microchip.com/downloads/en/DeviceDoc/21881e.pdf, Height=1.45mm, Mouser Price/Stock=https://www.mouser.com/Search/Refine.aspx?Keyword=579-MCP6231UT-E%2FOT, RS Price/Stock=https://uk.rs-online.com/web/p/products/6674468
IC10 IC18: "Integrated Circuit", Manufacturer_Name="Linear Technology", Mouser Part Number=584-1963AES8-3.3PBF, RS Part Number=7618550P, Datasheet Link=http://www.linear.com/docs/3709, Height=1.752mm, Manufacturer_Part_Number=LT1963AES8-3.3#PBF, Mouser Price/Stock=https://www.mouser.com/Search/Refine.aspx?Keyword=584-1963AES8-3.3PBF, RS Price/Stock=http://uk.rs-online.com/web/p/products/7618550P
IC11 IC13: "Integrated Circuit", Manufacturer_Name="Texas Instruments", Mouser Part Number=595-SN74HC00D, RS Part Number=0526234, Datasheet Link=http://www.ti.com/lit/gpn/sn74hc00, Height=1.75mm, Manufacturer_Part_Number=SN74HC00D, Mouser Price/Stock=https://www.mouser.com/Search/Refine.aspx?Keyword=595-SN74HC00D, RS Price/Stock=http://uk.rs-online.com/web/p/products/0526234
IC12: "Integrated Circuit", Manufacturer_Name="ON Semiconductor", Mouser Part Number=512-MM74HC02M, RS Part Number=7613555P, Datasheet Link=https://www.fairchildsemi.com/datasheets/MM/MM74HC02.pdf, Height=1.75mm, Manufacturer_Part_Number=MM74HC02M, Mouser Price/Stock=https://www.mouser.com/Search/Refine.aspx?Keyword=512-MM74HC02M, RS Price/Stock=http://uk.rs-online.com/web/p/products/7613555P
IC15: "Integrated Circuit", Manufacturer_Name="Analog Devices", Mouser Part Number=584-TMP36GRTZ-R7, RS Part Number=8099367P, Datasheet Link=http://componentsearchengine.com/Datasheets/3/TMP36GRTZ-REEL7.pdf, Height=1.45mm, Manufacturer_Part_Number=TMP36GRTZ-REEL7, Mouser Price/Stock=https://www.mouser.com/Search/Refine.aspx?Keyword=584-TMP36GRTZ-R7, RS Price/Stock=http://uk.rs-online.com/web/p/products/8099367P
IC16: "Integrated Circuit", Manufacturer_Name="Texas Instruments", Mouser Part Number=595-INA194AIDBVT, RS Part Number=5457625P, Datasheet Link=http://www.ti.com/lit/ds/symlink/ina194.pdf, Height=1.45mm, Manufacturer_Part_Number=INA194AIDBVT, Mouser Price/Stock=https://www.mouser.com/Search/Refine.aspx?Keyword=595-INA194AIDBVT, RS Price/Stock=http://uk.rs-online.com/web/p/products/5457625P
IC17: "Integrated Circuit", Manufacturer_Name="ON Semiconductor", Mouser Part Number=512-FPF2700MX, RS Part Number=8088966P, Datasheet Link=https://www.onsemi.com/pub/Collateral/FPF2702-D.pdf, Height=1.75mm, Manufacturer_Part_Number=FPF2700MX, Mouser Price/Stock=https://www.mouser.com/Search/Refine.aspx?Keyword=512-FPF2700MX, RS Price/Stock=http://uk.rs-online.com/web/p/products/8088966P
IC100 IC101: "Integrated Circuit", Manufacturer_Name="Linear Technology", Mouser Part Number=584-LT1963EST-2.5, Datasheet Link=https://www.mouser.com/datasheet/2/609/1963fc-1270290.pdf, Height=1.8mm, Manufacturer_Part_Number=LT1963EST-2.5, Mouser Price/Stock=https://www.mouser.com/Search/Refine.aspx?Keyword=584-LT1963EST-2.5
IC102 IC104: "Integrated Circuit", Manufacturer_Name="Linear Technology", Mouser Part Number=584-LT5560EDD#PBF, RS Part Number=7869705, Datasheet Link=https://www.analog.com/media/en/technical-documentation/data-sheets/5560f.pdf, Height=0.8mm, Manufacturer_Part_Number=LT5560EDD#PBF, Mouser Price/Stock=https://www.mouser.com/Search/Refine.aspx?Keyword=584-LT5560EDD%23PBF, RS Price/Stock=https://uk.rs-online.com/web/p/products/7869705
IC105: "Integrated Circuit", Manufacturer_Name=Microchip, Manufacturer_Part_Number=MCP6231UT-E/LT, Mouser Part Number=579-MCP6231UT-E/LT, RS Part Number=7240643P, Allied Price/Stock=http://www.alliedelec.com/microchip-technology-inc-mcp6231ut-e-lt/70414866/, Allied_Number=70414866, Datasheet Link=http://ww1.microchip.com/downloads/en/DeviceDoc/21881e.pdf, Height=1.1mm, Mouser Price/Stock=https://www.mouser.com/Search/Refine.aspx?Keyword=579-MCP6231UT-E%2FLT, RS Price/Stock=http://uk.rs-online.com/web/p/products/7240643P
IC106: "Integrated Circuit", Manufacturer_Name="ON Semiconductor", Mouser Part Number=512-FPF2004, RS Part Number=8088916P, Datasheet Link=https://www.onsemi.com/pub/Collateral/FPF2001-D.pdf, Height=1.1mm, Manufacturer_Part_Number=FPF2004, Mouser Price/Stock=https://www.mouser.com/Search/Refine.aspx?Keyword=512-FPF2004, RS Price/Stock=http://uk.rs-online.com/web/p/products/8088916P
J1: "Connector", Manufacturer_Name=SAMTEC, Mouser Part Number=200-QSH03001LDAK, RS Part Number=1587735, Datasheet Link=http://suddendocs.samtec.com/prints/qsh-xxx-01-x-d-xxx-mkt.pdf, Height=3.35mm, Manufacturer_Part_Number=QSH-030-01-L-D-A-K, Mouser Price/Stock=https://www.mouser.com/Search/Refine.aspx?Keyword=200-QSH03001LDAK, RS Price/Stock=http://uk.rs-online.com/web/p/products/1587735
J2: "Connector", Manufacturer_Name=SAMTEC, Mouser Part Number=200-QTH03002LDA, RS Part Number=7678748P, Datasheet Link=http://suddendocs.samtec.com/prints/qth-xxx-xx-x-d-xxx-mkt.pdf, Height=7.064mm, Manufacturer_Part_Number=QTH-030-02-L-D-A, Mouser Price/Stock=https://www.mouser.com/Search/Refine.aspx?Keyword=200-QTH03002LDA, RS Price/Stock=http://uk.rs-online.com/web/p/products/7678748P
J?: "Connector", Manufacturer_Name=SAMTEC, Datasheet Link=http://suddendocs.samtec.com/prints/fsi-1xx-xx-xxx-d-x-xx-xx-mkt.pdf, Height=7.4mm, Manufacturer_Part_Number=FSI-105-06-L-D-AD-TR
L18: "Inductor", Manufacturer_Name=COILCRAFT, Mouser Part Number=994-MSS5131-472MLB, Datasheet Link=http://www.coilcraft.com/pdfs/mss5131.pdf, Manufacturer_Part_Number=MSS5131-472MLB, Mouser Price/Stock=https://www.mouser.com/Search/Refine.aspx?Keyword=994-MSS5131-472MLB
L19: "Inductor", Manufacturer_Name=COILCRAFT, Mouser Part Number=994-MSS5131-103MLB, Datasheet Link=https://componentsearchengine.com/Datasheets/1/MSS5131-103MLB.pdf, Manufacturer_Part_Number=MSS5131-103MLB, Mouser Price/Stock=https://www.mouser.com/Search/Refine.aspx?Keyword=994-MSS5131-103MLB
Q1: "Integrated Circuit", Manufacturer_Name="ON Semiconductor", Mouser Part Number=512-FDC638P, RS Part Number=7614413, Datasheet Link=http://docs-emea.rs-online.com/webdocs/10e2/0900766b810e24f1.pdf, Height=1.1mm, Manufacturer_Part_Number=FDC638P, Mouser Price/Stock=https://www.mouser.com/Search/Refine.aspx?Keyword=512-FDC638P, RS Price/Stock=https://uk.rs-online.com/web/p/products/7614413
R1 R2 R3 R4 R5 R6 R7 R8 R9 R10 R11 R12 R13 R14 R15 R16 R17 R18 R19 R20 R21 R22 R23 R24 R25 R26 R27 R28 R29 R30 R31 R32 R33 R34 R35 R36 R37 R38 R39 R40 R41 R42 R100 R101 R102 R103 R104 R105 R106 R107 R108 R109 R110 R111 R112 R113 R114 R115 R116 R117 R118 R119 R120 R121 R122 R123 R124 R125 R200 R201 R202 R203 R204 R205 R206 R207 R208 R209 R210 R211 R212 R213 R214 R215 R216 R217 R218 R219 R220 R221 R222 R223 R653: "Resistor", LatestRevisionDate=17-Jul-2002, LatestRevisionNote="Re-released for DXP Platform.", PackageDescription="Axial Device, Thru-Hole; 2 Leads; 0.3 in Pin Spacing", PackageReference=AXIAL-0.3, Published=8-Jun-2000, Publisher="Altium Limited"
S1 S2: "Switch", Manufacturer_Name="C & K COMPONENTS", Mouser Part Number=611-HDT0004, RS Part Number=7931608P, Datasheet Link=https://www.ckswitches.com/media/1307/hdt.pdf, Height=3mm, Manufacturer_Part_Number=HDT0004, Mouser Price/Stock=https://www.mouser.com/Search/Refine.aspx?Keyword=611-HDT0004, RS Price/Stock=http://uk.rs-online.com/web/p/products/7931608P
Y1 Y2 Y3 Y4: "Crystal or Oscillator", Manufacturer_Name=ECS, Mouser Part Number=520-ECS-75SMF45A30B, Datasheet Link=https://www.mouser.com/datasheet/2/122/ECS_75SMF-10007.pdf, Height=0.95mm, Manufacturer_Part_Number=ECS-75SMF45A30B, Mouser Price/Stock=https://www.mouser.com/Search/Refine.aspx?Keyword=520-ECS-75SMF45A30B
L1 L2 L3 L4 L5 L6 L7 L8 L9 L10 L11 L12 L13 L14 L15 L16 L17 L100 L101 L102 L103 L104 L105 L106 L107 L108 L109 L110 L111 L112 L113 L114 L115 L116 L200 L201 L202: Code_IEC=1005, Code_JEITA=0402, LatestRevisionDate=29-May-2009, LatestRevisionNote="IPC-7351 Footprint Added.", PackageDescription="Chip Inductor", PackageReference=0402-A, Published=8-Jun-2000, Publisher="Altium Limited"

## Nets (pads, with @x,y where several pads share a name; then routed paths per layer and width w, separated by ;. In a path a pad name is that pad's centre, name@x,y a point inside that pad or via, vN(x,y) a via of type N, cw(c..) or ccw(c..) an arc to the next point about the centre after c; other vN are vias at no path point)
2.5V_1: *1.2 *1.6 C101.1
2.5V_2: *?.2 *?.6 C113.2 R108.1 R109.1
2.5V_3: C214.1 C215.1 IC900.6 R203.2 R204.2
2.83V: C14.1 C46.1 C47.1 IC1.6 IC1.12 IC1.13 IC1.16 IC3.6 IC3.12 IC3.13 IC3.16 IC10.1 R2.2 R5.1 R13.1 R15.2 R25.2
3.0V: C67.2 C69.2 IC6.5 IC18.1 R41.1
3.0V_1: C102.2 C103.2 C122.2 C125.2 C134.2 C138.1 IC100.1 IC101.1 IC102.2 IC105.5 IC106.1 L106.1 L108.2 L115.1 R120.1
3.0V_2: *1.3 *?.3 C101.2 C102.1 C103.1 C104.1 C105.1 C106.1 C107.1 C108.1 C109.1 C109.2 C110.1 C112.1 C112.2 C113.1 C117.1 C118.1 C118.2 C119.1 C119.2 C120.1 C122.1 C123.1 C124.1 C125.1 C126.1 C126.2 C127.1 C127.2 C128.1 C128.2 C131.1 C131.2 C132.1 C134.1 C135.2 C136.1 C137.2 C138.2 C212.2 IC100.2 IC100.4 IC101.2 IC101.4 IC102.9 IC104.2 IC104.3 IC104.7 IC105.2 IC106.2 IC107.2 IC107.3 IC550.1 IC550.3 IC550.4 IC550.6 IC678.3 L100.1 L101.1 L101.2 L102.1 L103.1 L103.2 L104.1 L104.2 L109.1 L110.2 L111.1 L113.1 R104.1 R107.1 R107.2 R111.1 R112.1 R114.1 R115.1 R116.1 R116.2 R117.2 R118.1 R118.2 R119.2 R123.2 Y1.1 Y1.4 Y2.1 Y2.4 Y3.1 Y3.4 Y4.1 Y4.4
3.0V_3: C211.1 C213.1 L202.2 R206.1 R208.1
3.0V_log: C59.1 IC12.14 IC14.1 IC14.4 IC14.5
-Z_CIC: J1.24 J2.24 J?.4 J?.5
-Z_DEPLOY_SW_1: J1.17 J2.17 S1.1 S1.2
-Z_DEPLOY_SW_2: J1.18 J2.18 S2.1 S2.2
-Z_THERMISTOR: J1.22 J2.22 J?.1 J?.2
CMD_H/W_Bit_0: J1.40 J2.40
CMD_H/W_Bit_1: J1.41 J2.41
CMD_H/W_Bit_2: J1.42 J2.42
CMD_H/W_Bit_3: J1.43 J2.43 R30.1
CMD_H/W_BITS_STROBE: J1.44 J2.44
CMD_SERIAL_DATA: J1.49 J2.49
GND: C1.1 C2.1 C3.1 C4.1 C6.1 C8.1 C9.1 C14.2 C15.1 C16.1 C18.2 C19.2 C20.2 C21.2 C23.2 C27.2 C28.1 C29.1 C30.2 C34.2 C36.2 C37.2 C38.2 C39.2 C40.2 C41.2 C42.2 C43.1 C44.2 C45.2 C46.2 C47.2 C48.2 C49.2 C50.1 C52.2 C53.2 C54.1 C55.1 C56.1 C57.2 C58.1 C59.2 C60.2 C61.1 C62.1 C63.2 C64.2 C65.2 C66.2 C67.1 C68.2 C69.1 C201.1 C203.2 C204.1 C205.2 C206.2 C207.2 C208.2 C209.2 C210.2 C211.2 C213.2 C214.2 C651.1 D6.1 IC1.2 IC1.9 IC1.10 IC2.2 IC2.5 IC3.2 IC3.9 IC3.10 IC4.2 IC4.5 IC5.6 IC5.8 IC5.11 IC5.13 IC6.2 IC7.2 IC8.5 IC9.5 IC10.3 IC10.6 IC10.7 IC11.7 IC12.7 IC12.8 IC12.9 IC13.7 IC14.2 IC15.3 IC15.5 IC16.2 IC17.5 IC17.6 IC18.3 IC18.6 IC18.7 IC900.3 J?.3 L3.1 L7.1 L12.2 L14.1 R4.2 R9.2 R10.1 R12.1 R12.2 R19.2 R23.2 R24.1 R28.1 R29.1 R32.1 R33.1 R36.2 R40.2 R42.1 R201.1 R202.2 R205.1 R212.2 R221.1 R223.1 R653.2 S1.3 S1.4 S2.3 S2.4
I2C2_SCL: J1.19 J2.19
I2C2_SDA: J1.20 J2.20
ICR_RSSI: J1.37 J2.37
IF+: IC678.1 R103.2 R105.1
IF-: IC678.2 R105.2 R106.1
LT: IC12.4 IC106.4
MODEM_CXR_DET: J1.53 J2.53
Net*1_1: *1.1 C104.2 R100.2 R102.2 R104.2
Net*1_4: *1.4 IC102.1
Net*1_5: *1.5 IC102.8
Net*?_1: *?.1 C121.2 R108.2 R109.2 R110.2
Net*?_4: *?.4 IC104.1
Net*?_5: *?.5 IC104.8
NetC1_2: C1.2 L1.1 R1.2
NetC2_2: C2.2 C3.2 L4.2 R2.1 R3.1
NetC4_2: C4.2 C12.2 L3.2
NetC6_2: C6.2 C12.1 L5.1 R6.1
NetC8_2: C8.2 C13.2 L6.1 L11.1
NetC9_2: C9.2 C11.2 L6.2 R4.1 R7.1
NetC11_1: C11.1 L2.1
NetC13_1: C13.1 IC2.4 L4.1 R3.2
NetC15_2: C15.2 L8.1 R8.2
NetC16_2: C16.2 L10.2 R10.2
NetC17_1: C17.1 C20.1 L9.1 R6.2
NetC17_2: C17.2 C27.1 L14.2
NetC18_1: C18.1 IC2.3 R5.2
NetC21_1: C21.1 L5.2 L9.2 L10.1
NetC23_1: C23.1 C25.1 L11.2 R7.2 R9.1
NetC25_2: C25.2 L13.1
NetC28_2: C28.2 C29.2 L16.2 R13.2 R14.1
NetC30_1: C30.1 IC4.3 R15.1
NetC31_1: C31.1 L15.1
NetC31_2: C31.2 IC4.4 L16.1 R14.2
NetC32_1: C32.1 L17.2
NetC32_2: C32.2 IC550.5
NetC34_1: C34.1 C43.2 IC5.1 IC5.4 IC5.7 IC5.10 IC6.3 IC8.2 IC9.2 R17.1
NetC38_1: C38.1 C39.1 C41.1 L18.2 L19.1 R20.1
NetC44_1: C44.1 C45.1 D?.2 IC9.3 R23.1
NetC50_2: C50.2 R26.1
NetC51_1: C51.1 IC7.3 IC8.1 R27.2
NetC51_2: C51.2 IC8.4 R22.2 R27.1
NetC54_2: C54.2 IC11.1 IC11.2 R29.2 R30.2
NetC55_2: C55.2 IC11.5 IC11.9 IC11.10 R31.2 R32.2
NetC56_2: C56.2 IC13.2 IC13.10 R33.2 R34.2
NetC57_1: C57.1 IC13.4 IC13.5 R35.2 R36.1
NetC58_2: C58.2 IC15.1 R37.2
NetC62_2: C62.2 IC16.1 R38.2
NetC65_1: C65.1 IC16.3 IC17.8 R39.1
NetC68_1: C68.1 IC18.5 IC18.8
NetC100_1: C100.1 R101.2
NetC100_2: C100.2 Y1.3
NetC105_2: C105.2 C106.2 IC100.3
NetC107_2: C107.2 C108.2 IC101.3
NetC110_2: C110.2 Y1.2
NetC111_1: C111.1 Y2.3
NetC111_2: C111.2 R106.2
NetC114_1: C114.1 C116.2 L105.2
NetC114_2: C114.2 Y1.6
NetC115_1: C115.1 C116.1 L106.2 L107.2
NetC115_2: C115.2 Y2.6
NetC117_2: C117.2 Y2.2
NetC120_2: C120.2 IC102.7
NetC121_1: C121.1 R110.1
NetC123_2: C123.2 L109.2 R111.2
NetC124_2: C124.2 IC678.7 IC678.8
NetC129_1: C129.1 C130.1 Y3.6
NetC129_2: C129.2 L108.1 L112.1
NetC130_2: C130.2 C133.1 Y4.6
NetC132_2: C132.2 Y3.2
NetC133_2: C133.2 L114.1 L115.2
NetC135_1: C135.1 IC678.4 R117.1 R121.1
NetC136_2: C136.2 Y4.2
NetC137_1: C137.1 L116.1 R119.1
NetC200_1: C200.1 IC900.4
NetC200_2: C200.2 R200.2 R201.2
NetC201_2: C201.2 L200.1 R200.1 R202.1
NetC202_1: C202.1 C203.1
NetC202_2: C202.2 L200.2 L201.1
NetC204_2: C204.2 L201.2
NetC205_1: C205.1 C206.1 L202.1 R207.1
NetC207_1: C207.1 R213.1
NetC208_1: C208.1 R215.1
NetC209_1: C209.1 R216.1
NetC210_1: C210.1 R217.1
NetC212_1: C212.1
NetC650_1: C650.1 R653.1
NetC650_2: C650.2 IC5.12
NetC651_2: C651.2 IC5.9
NetD6_2: D6.2 L18.1 Q1.1 Q1.2 Q1.5 Q1.6
NetD?_1: D?.1 IC5.2
NetIC1_3: IC1.3 L2.2
NetIC1_14: IC1.14 L1.2
NetIC2_1: IC2.1 R11.1
NetIC3_3: IC3.3 L13.2
NetIC3_14: IC3.14 L8.2
NetIC4_1: IC4.1 R16.1
NetIC5_3: IC5.3 R17.2 R19.1
NetIC7_1: IC7.1 R26.2
NetIC8_3: IC8.3 R20.2 R24.2
NetIC9_1: IC9.1 IC9.4 R21.1 R22.1
NetIC10_2: IC10.2 R25.1 R28.2
NetIC11_3: IC11.3 IC11.4 IC13.1 IC13.13
NetIC11_6: IC11.6 IC11.13
NetIC11_8: IC11.8 IC12.2
NetIC11_12: IC11.12 IC12.5 IC12.6 IC13.11
NetIC12_3: IC12.3 IC13.3
NetIC13_6: IC13.6 IC13.9
NetIC13_8: IC13.8 IC13.12
NetIC17_3: IC17.3 R40.1
NetIC18_2: IC18.2 R41.2 R42.2
NetIC102_3: IC102.3 L100.2
NetIC102_4: IC102.4 L102.2
NetIC102_5: IC102.5 L107.1
NetIC102_6: IC102.6 L105.1
NetIC104_4: IC104.4 L116.2 R114.2
NetIC104_5: IC104.5 L113.2
NetIC104_6: IC104.6 L110.1
NetIC105_1: IC105.1 R120.2 R123.1
NetIC105_3: IC105.3 R122.1 R124.2
NetIC105_4: IC105.4 R121.2 R124.1 R125.1
NetIC106_5: IC106.5 IC107.5
NetIC200_1: R219.2 R220.1
NetIC200_2: R222.2 R223.2
NetIC200_4: R214.1
NetIC200_5: R209.2 R210.1
NetIC200_7: R206.2
NetIC200_8: R209.1 R211.2
NetIC201_1: R207.2
NetIC201_8: R210.2
NetIC201_9: R214.2
NetIC201_10: 
NetIC203_5: 
NetIC550_2: IC550.2 L111.2
NetIC678_5: IC678.5 L112.2 R113.1
NetIC678_6: IC678.6 L114.2 R113.2
NetIC900_1: IC900.1 R203.1 R204.1 R205.2
NetL15_2: L15.2 R11.2
NetL17_1: L17.1 R16.2
NetR100_1: R100.1 R102.1
NetR101_1: R101.1 R103.1
NetR112_2: R112.2 Y3.3
NetR115_2: R115.2 Y4.3
NetR208_2: R208.2 R211.1 R212.1
NetR218_2: R218.2 R219.1 R221.2
PAEn_N: IC12.13 IC17.4
PAEn_P: IC6.4 IC10.5 IC11.11 IC12.11 IC12.12 IC107.4
PB_ENABLE: J1.47 J2.47 R35.1
RX/TX_CNTL: J1.45 J2.45 R34.1
SENSOR_PWR: C60.1 C61.2 IC15.2 IC16.4 J1.51 J2.51
SPI1_MISO: J1.3 J2.3 R213.2
SPI1_MOSI: J1.4 J2.4 R215.2
SPI1_SCLK: J1.2 J2.2 R216.2
SPI1_SS: J1.46 J2.46 R217.2
TLM: IC12.1
TLM_DATA: J1.38 J2.38 R218.1
TLM_ENABLE: J1.52 J2.52 R31.1
TX_PA_CURRENT: C52.1 J1.33 J2.33 R38.1
TX_PWR_FWD: J1.48 J2.48 R21.2 R122.2
TX_PWR_RFLT: IC5.5 J1.58 J2.58
TX_TEMP: C53.1 J1.34 J2.34 R37.1
Vbatt: C48.1 C49.1 C63.1 C64.1 IC10.8 IC17.1
VccPA: C19.1 C40.1 C42.1 L7.2 L12.1 L19.2 R1.1 R8.1
VGA_CTRL: J1.36 J2.36 R125.2
VPA: C36.1 C37.1 C66.1 IC7.4 IC7.5 IC7.6 IC16.5 Q1.3 Q1.4 R18.1 R18.2 R39.2
pads on no net: C215.2 IC1.1 IC1.4 IC1.5 IC1.7 IC1.8 IC1.11 IC1.15 IC1.17 IC3.1 IC3.4 IC3.5 IC3.7 IC3.8 IC3.11 IC3.15 IC3.17 IC6.1 IC10.4 IC11.14 IC12.10 IC13.14 IC14.3 IC15.4 IC17.2 IC17.7 IC18.4 IC104.9 IC106.3 IC107.1 IC900.2 IC900.5 J1.1 J1.5 J1.6 J1.7 J1.8 J1.9 J1.10 J1.11 J1.12 J1.13 J1.14 J1.15 J1.16 J1.21 J1.23 J1.25 J1.26 J1.27 J1.28 J1.29 J1.30 J1.31 J1.32 J1.35 J1.39 J1.50 J1.54 J1.55 J1.56 J1.57 J1.59 J1.60 J1.MH1 J1.MH2 J1.MP1 J1.MP2 J1.MP3 J1.MP4 J2.1 J2.5 J2.6 J2.7 J2.8 J2.9 J2.10 J2.11 J2.12 J2.13 J2.14 J2.15 J2.16 J2.21 J2.23 J2.25 J2.26 J2.27 J2.28 J2.29 J2.30 J2.31 J2.32 J2.35 J2.39 J2.50 J2.54 J2.55 J2.56 J2.57 J2.59 J2.60 J2.61 J2.62 J2.63 J2.64 J?.6 J?.7 J?.8 J?.9 J?.10 J?.MH1 J?.MH2 R220.2 R222.1 Y1.5 Y2.5 Y3.5 Y4.5